# Altium PCB nguon5v.PcbDoc
Units mm, origin at the board's own origin, x right, y up, seen from the top; angles counter-clockwise.
Board outline 80 x 40 mm, 2 copper layers (Top Layer, Bottom Layer); 11 components, 5 nets, 24 pads, 0 vias.
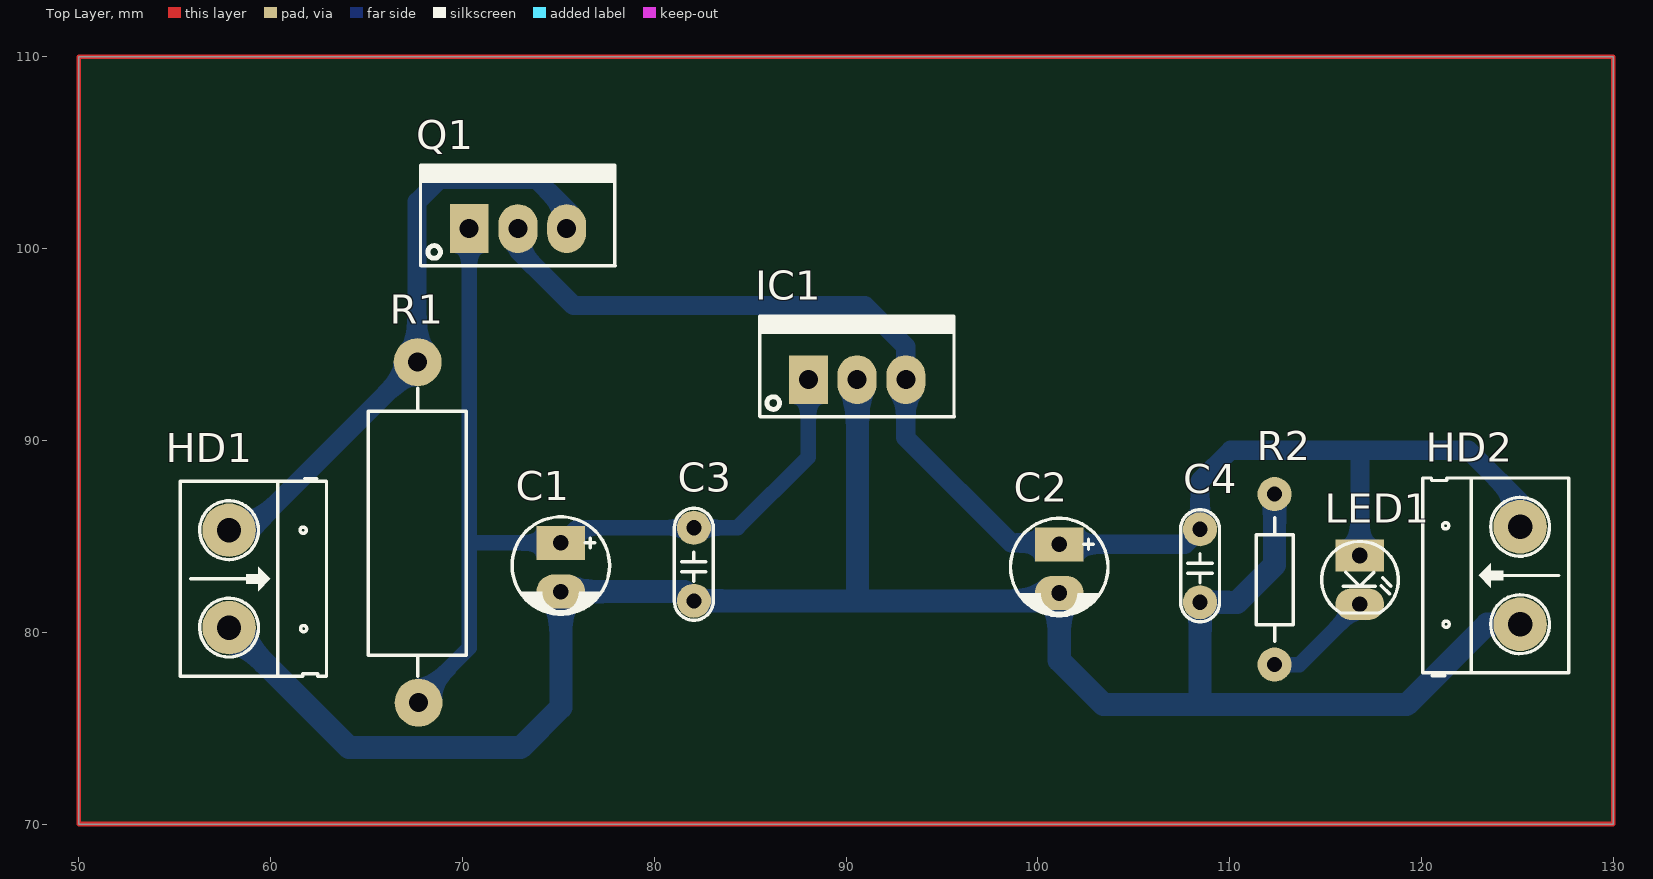
[diagram p0: Top Layer view]
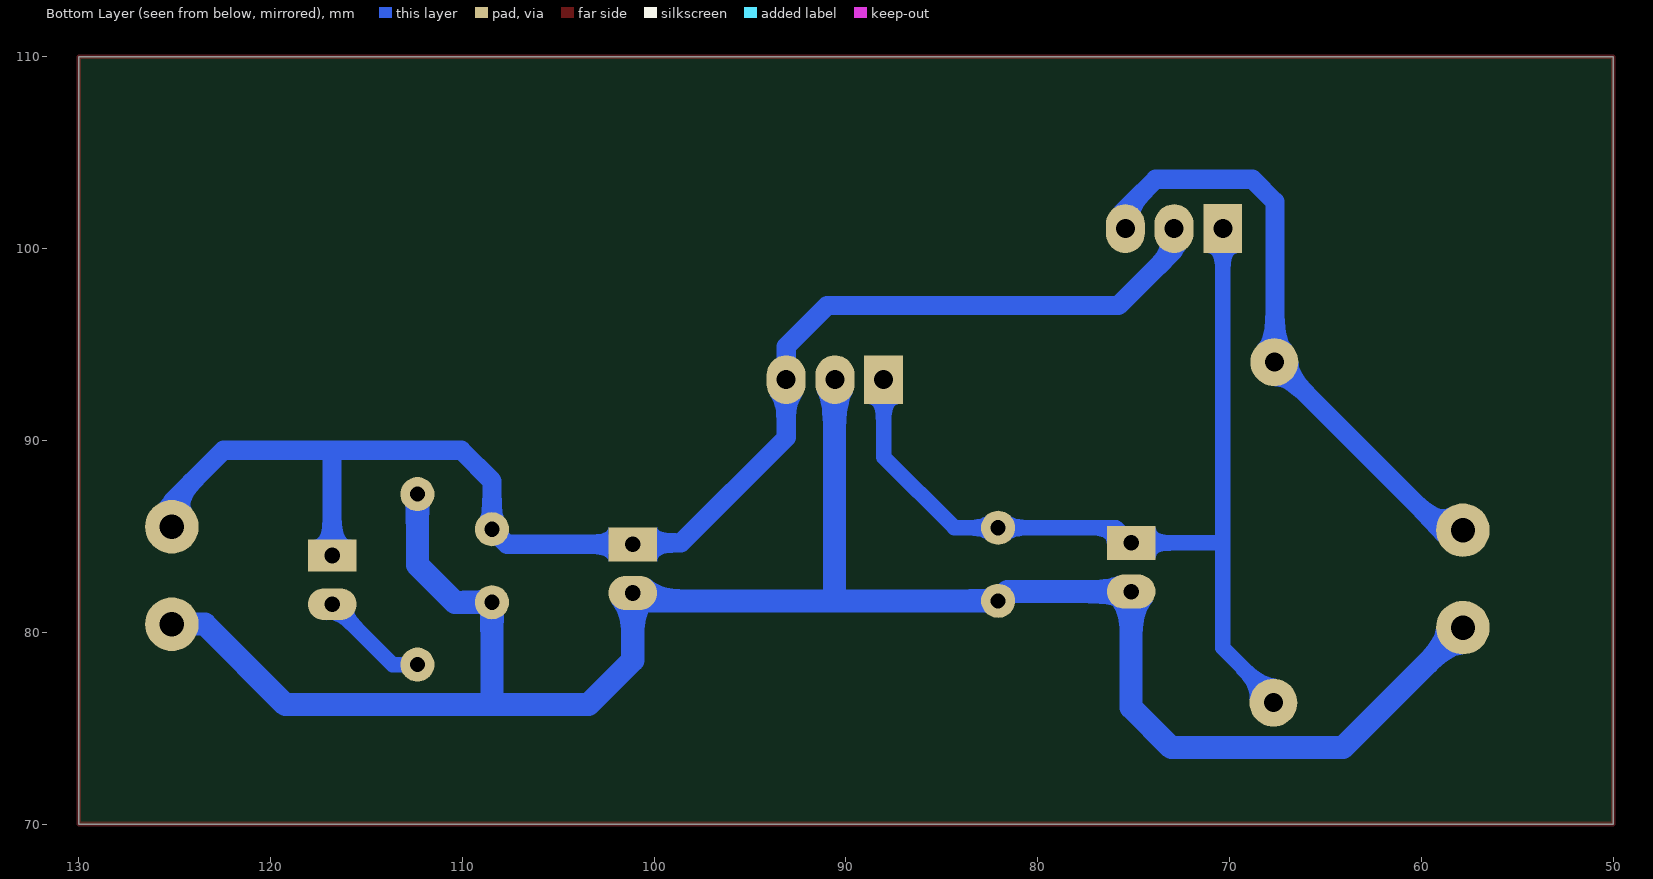
[diagram p1: Bottom Layer view, seen from below]
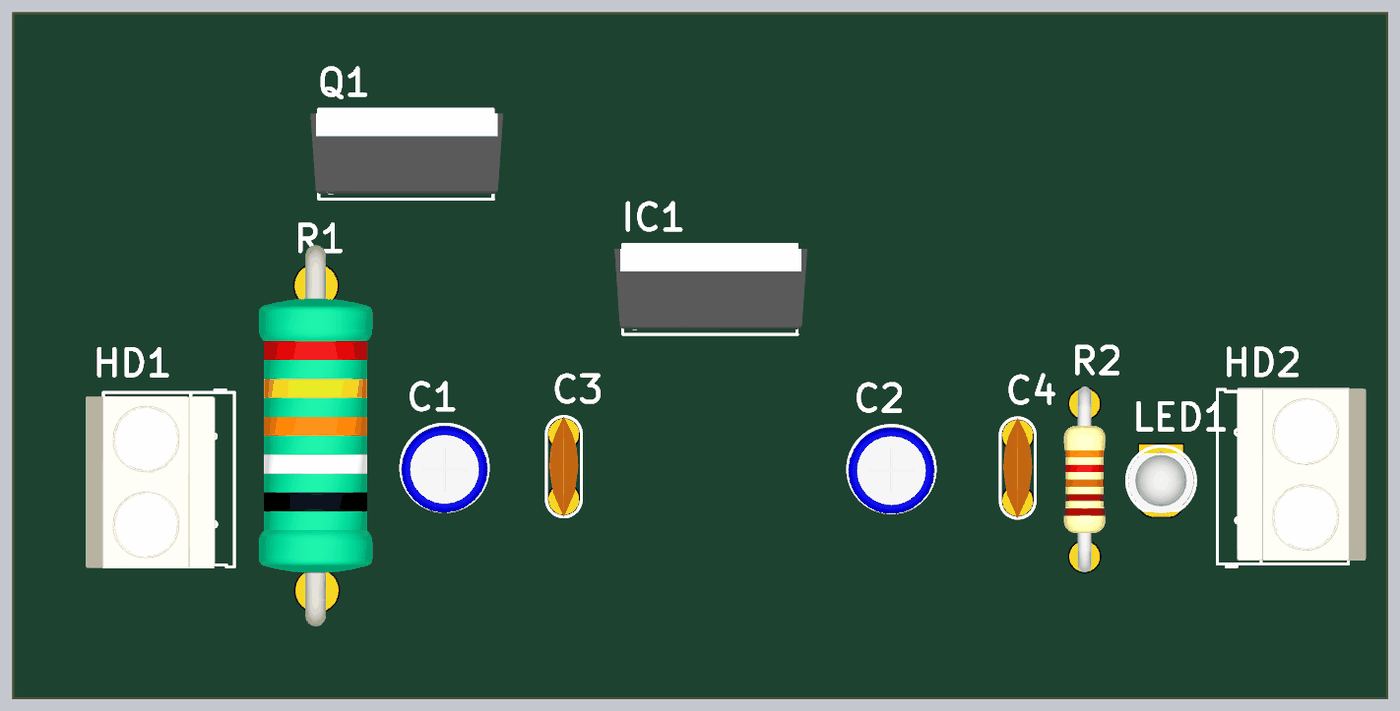
[diagram p2: 3D render of the assembled board from above, using the file's embedded part models]

## Layer stack, top to bottom
Top Solder: solder mask 0.0102, Solder Resist, Dk 3.5
Top Layer: signal copper 0.0356
Dielectric 1: dielectric 0.32, FR-4, Dk 4.8
Bottom Layer: signal copper 0.0356
Bottom Solder: solder mask 0.0102, Solder Resist, Dk 3.5

## Board outline
50,70 130,70 130,110 50,110

## Design rules (kind name [scope] priority, off if disabled: settings)
Clearance [All] p1: gap=0.5
PolygonConnect [All] p1: connectstyle=Relief reliefconductorwidth=0.254 reliefentries=4 polygonreliefangle="90 Angle" airgapwidth=0.254
RoutingLayers [All] p1: top layer_v5=FALSE bottom layer_v5=TRUE
RoutingVias [All] p1: holewidth=0.711 width=1.27 viastyle="Through Hole" minholewidth=0.711 minwidth=1.27 maxholewidth=0.711 maxwidth=1.27
SolderMaskExpansion [All] p1: expansion=0.102
Width NET [InNetClass('NET CLASS')] p1: maxlimit=0.8 minlimit=0.8 preferedwidth=0.8
Width Vout [InNet('VOUT')] p2: maxlimit=1 minlimit=1 preferedwidth=1
Width GND [InNet('GND')] p3: maxlimit=1.2 minlimit=1.2 preferedwidth=1.2
Width Vin [InNet('VIN')] p4: maxlimit=1 minlimit=1 preferedwidth=1
29 further rules are at their usual default settings.

## Classes and differential pairs
net class "NET CLASS": NetC1_1 NetLED1_2

## Components (designator, comment, footprint, x,y, rotation, side; value= is the part's Value field where it differs from the comment)
C1 "1000uF" CP1/2 75.133,84.658 r270 top
C2 "1000uF" CP1/2 101.117,84.582 r270 top
C3 "104" CN1.5 82.067,81.636 r90 top
C4 "104" CN1.5 108.458,81.559 r90 top
HD1 "Header 2" HED2 57.836,85.319 r270 top
HD2 "Header 2" HED2 125.146,80.416 r90 top
IC1 "LM7805" QTO-220 88.036,93.167 r0 top
LED1 "LED" LED-3 116.789,83.998 r270 top
Q1 "TIP42C" QTO-220 70.358,101.041 r0 top
R1 "47/2W" R2W 67.666,94.082 r270 top
R2 "330" R1/4W 112.344,87.198 r270 top

## Footprints (in the part's own frame and the unit in brackets; to place one, negate y for a bottom-side part, rotate by r counter-clockwise, add the part's x,y. Pads: shape width x height; smd on the part's side, far side on the other; paste and mask are expansions set on the pad)
CN1.5 [mil]
  round 70 hole 31: 1(0,0) 2(150,0)
  silkscreen extent -40,-40 190,40, body extent -40,-33 190,33, height 235
CP1/2 [mil] "Tu hoa < 22uF/16>50V"
  rect 70x100 hole 32: 1(0,0)
  oval 70x100 hole 32: 2(100,0)
  silkscreen extent -53,-100 146,100, body extent -49,-99 149,99, height 287
HED2 [mil] "Header 2, 2 pin, hight 300mil, Pin to Pin 200, Colour Green"
  round 110 hole 50: 1(0,0) 2(200,0)
  silkscreen extent -106,-100 300,200, body extent -92,-140 302,155, height 394
LED-3 [mil] "LED 2 PIN, 3ly Only colour"
  rect 65x100 hole 32: 1(0,0)
  oval 65x100 hole 32: 2(100,0)
  silkscreen extent -29,-78 118,79, body extent -13,-75 125,75, height 217
QTO-220 [mil] "TO-220 - 1-2-3"
  rect 80x100 hole 39: 1(0,0)
  oval 80x100 hole 39: 2(100,0) 3(200,0)
  silkscreen extent -100,-76 300,130, body extent -119,-64 322,121, height 755
R1/4W [mil] "R 1/4W, 2 Pin, 350mil"
  round 70 hole 31: 1(0,0) 2(350,0)
  silkscreen extent 48,-38 302,38, body extent -40,-47 386,47, height 111
R2W [mm] "R2W, 2 pin, 700mil"
  round 2.5 hole 1: 1(0,0) 2(17.755,0.051)
  silkscreen extent 1.37,-2.57 16.38,2.54, body extent -2.36,-3.33 19.84,3.27, height 8.3

## Part data
C1 C2: library part CP1, "Cap P  0,1uF < 22uF , 16 - 50V"
C3 C4: library part CN1.5, "Cap np 682pF => 104pF"
HD1 HD2: library part Hed2, "Header 2 (Green)"
IC1: library part LM78xx, "On ap +, from + 5 to + 24VDC"
LED1: "LED Single colour Green and Red"
Q1: "PNP 2W, BCE"
R1: library part R2W, "Resistor 2W"
R2: library part R1/4W, "Resistor 1/4W"

## Nets (pads, with @x,y where several pads share a name; then routed paths per layer and width w, separated by ;. In a path a pad name is that pad's centre, name@x,y a point inside that pad or via, vN(x,y) a via of type N, cw(c..) or ccw(c..) an arc to the next point about the centre after c; other vN are vias at no path point)
GND: C1.2 C2.2 C3.1 C4.1 HD1.2 HD2.1 IC1.2 R2.1 | length 108.7
  Bottom Layer w1.2: HD1.2 64.097,73.977 73.037,73.977 75.133,76.073 C1.2 81.585,82.118 C3.1 100.711,81.636 C2.2 101.117,78.537 103.429,76.225 108.56,76.225 ; 90.399,81.661 90.598,81.861 90.598,93.145 IC1.2 ; R2.1 112.344,83.515 110.388,81.559 C4.1 108.458,76.327 108.56,76.225 ; HD2.1 123.419,80.416 119.228,76.225 108.56,76.225
NetC1_1: C1.1 C3.2 IC1.1 Q1.1 R1.2 | length 49.3
  Bottom Layer w0.8: R1.2@67.64,76.454 70.358,79.172 70.358,84.607 ; Q1.1 70.358,84.607 ; IC1.1 88.036,89.129 84.353,85.446 C3.2 75.921,85.446 C1.1 70.409,84.658 70.358,84.607
NetLED1_2: LED1.2 R2.2 | length 5.7
  Bottom Layer w0.8: R2.2 113.64,78.308 LED1.2
VIN: HD1.1 Q1.3 R1.1 | length 31.8
  Bottom Layer w1: HD1.1 58.903,85.319 R1.1@67.64,94.056 ; R1.1 R1.1@67.64,94.056 ; Q1.3 75.214,101.265 75.214,102.255 73.857,103.611 68.804,103.611 67.64,102.448 R1.1@67.64,94.056
VOUT: C2.1 C4.2 HD2.2 IC1.3 LED1.1 Q1.2 | length 73.9
  Bottom Layer w1: Q1.2 72.898,99.924 75.794,97.028 90.983,97.028 93.116,94.894 IC1.3 93.116,90.145 98.603,84.658 C2.1@101.117,84.658 ; C2.1 107.671,84.582 C4.2 108.458,87.884 110.058,89.484 116.688,89.484 ; LED1.1 116.789,89.383 116.688,89.484 ; HD2.2 125.146,86.792 122.453,89.484 116.688,89.484
copper on no net: | length 240
  Top Layer w0.254: 50,70 50,110 130,110 130,70 50,70